# EAGLE board HGS_Reflector (EAGLE 9.6.1)
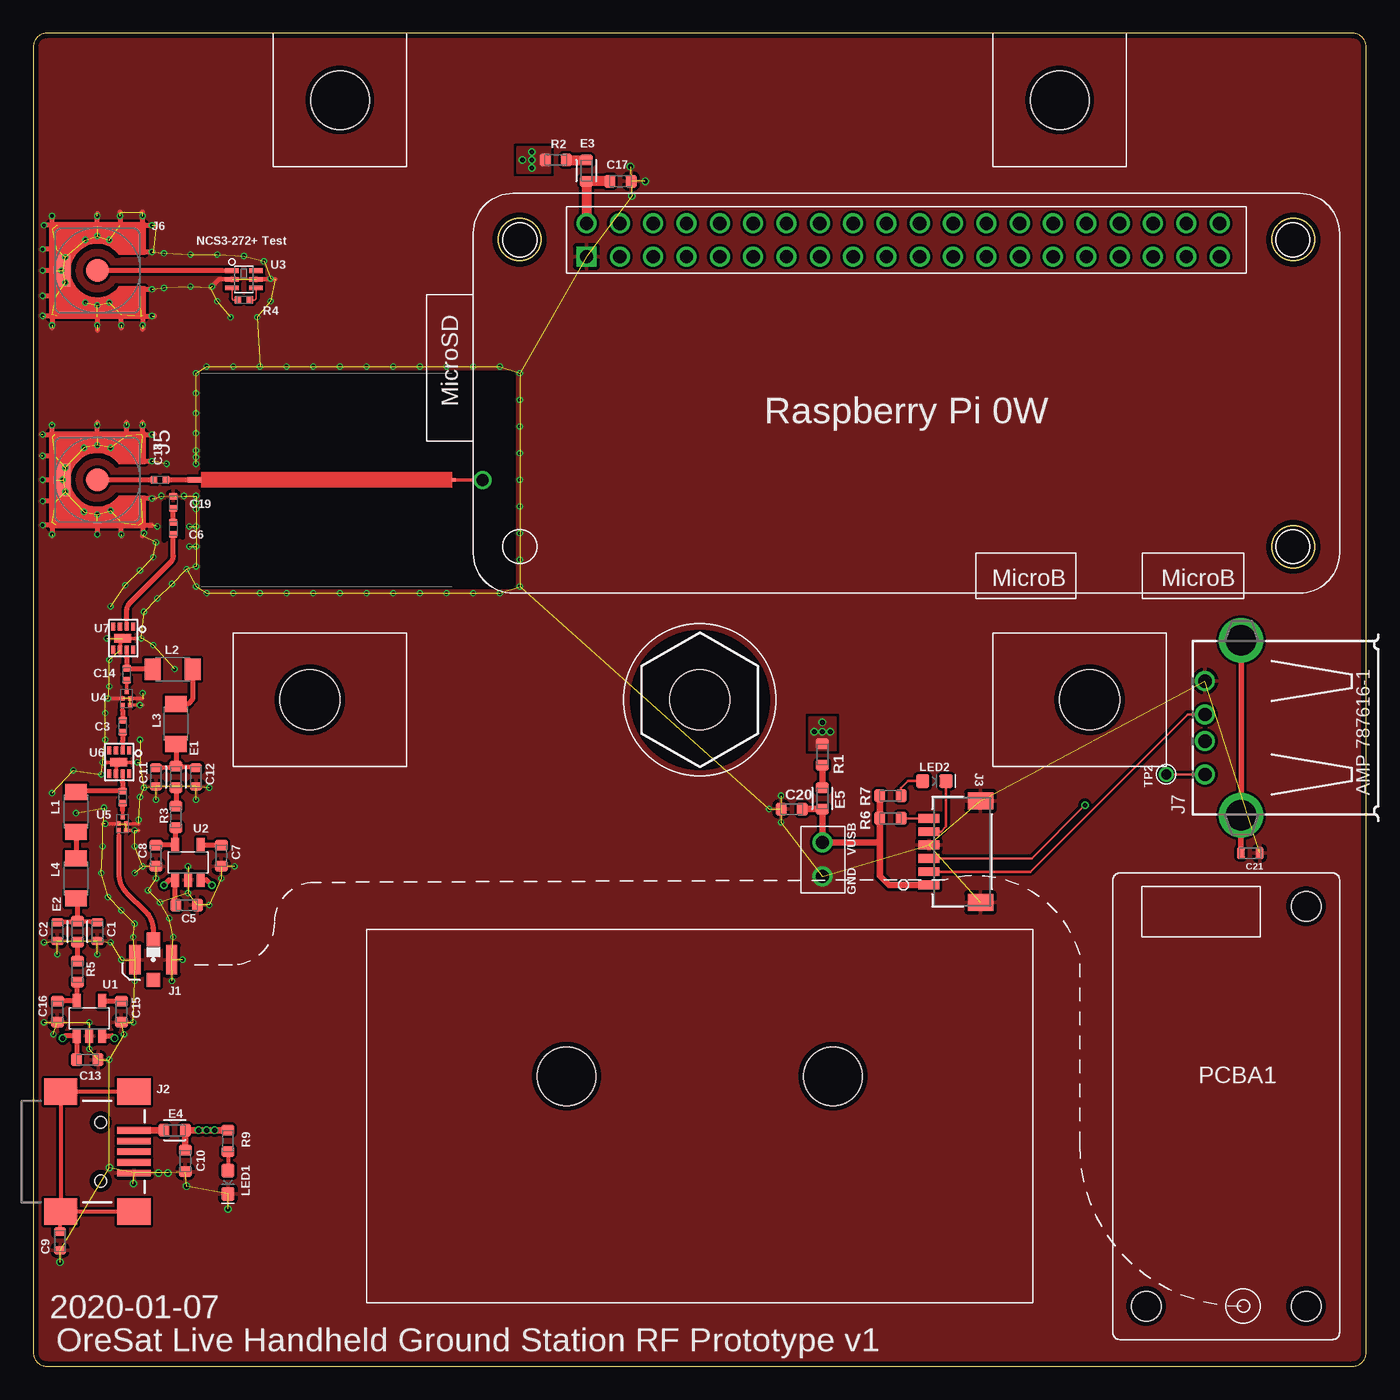
[diagram p0: board, top side]
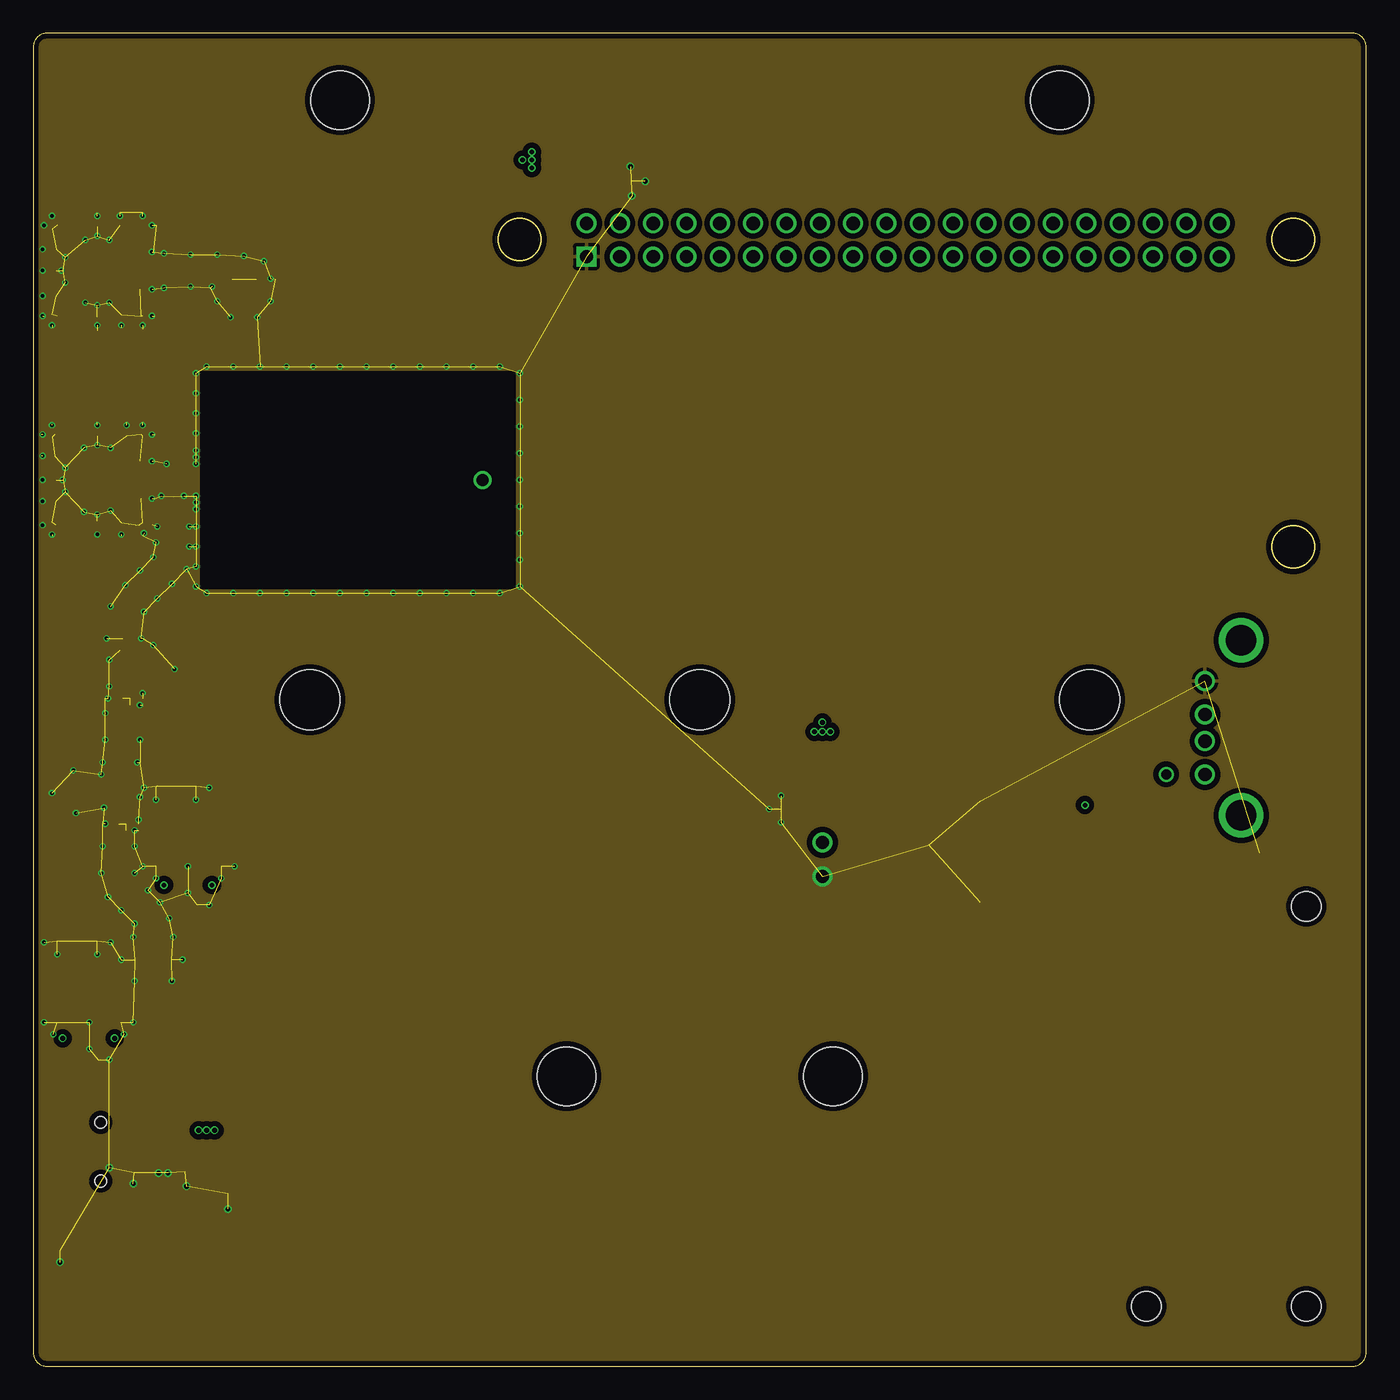
[diagram p1: board, inner layer Route2]
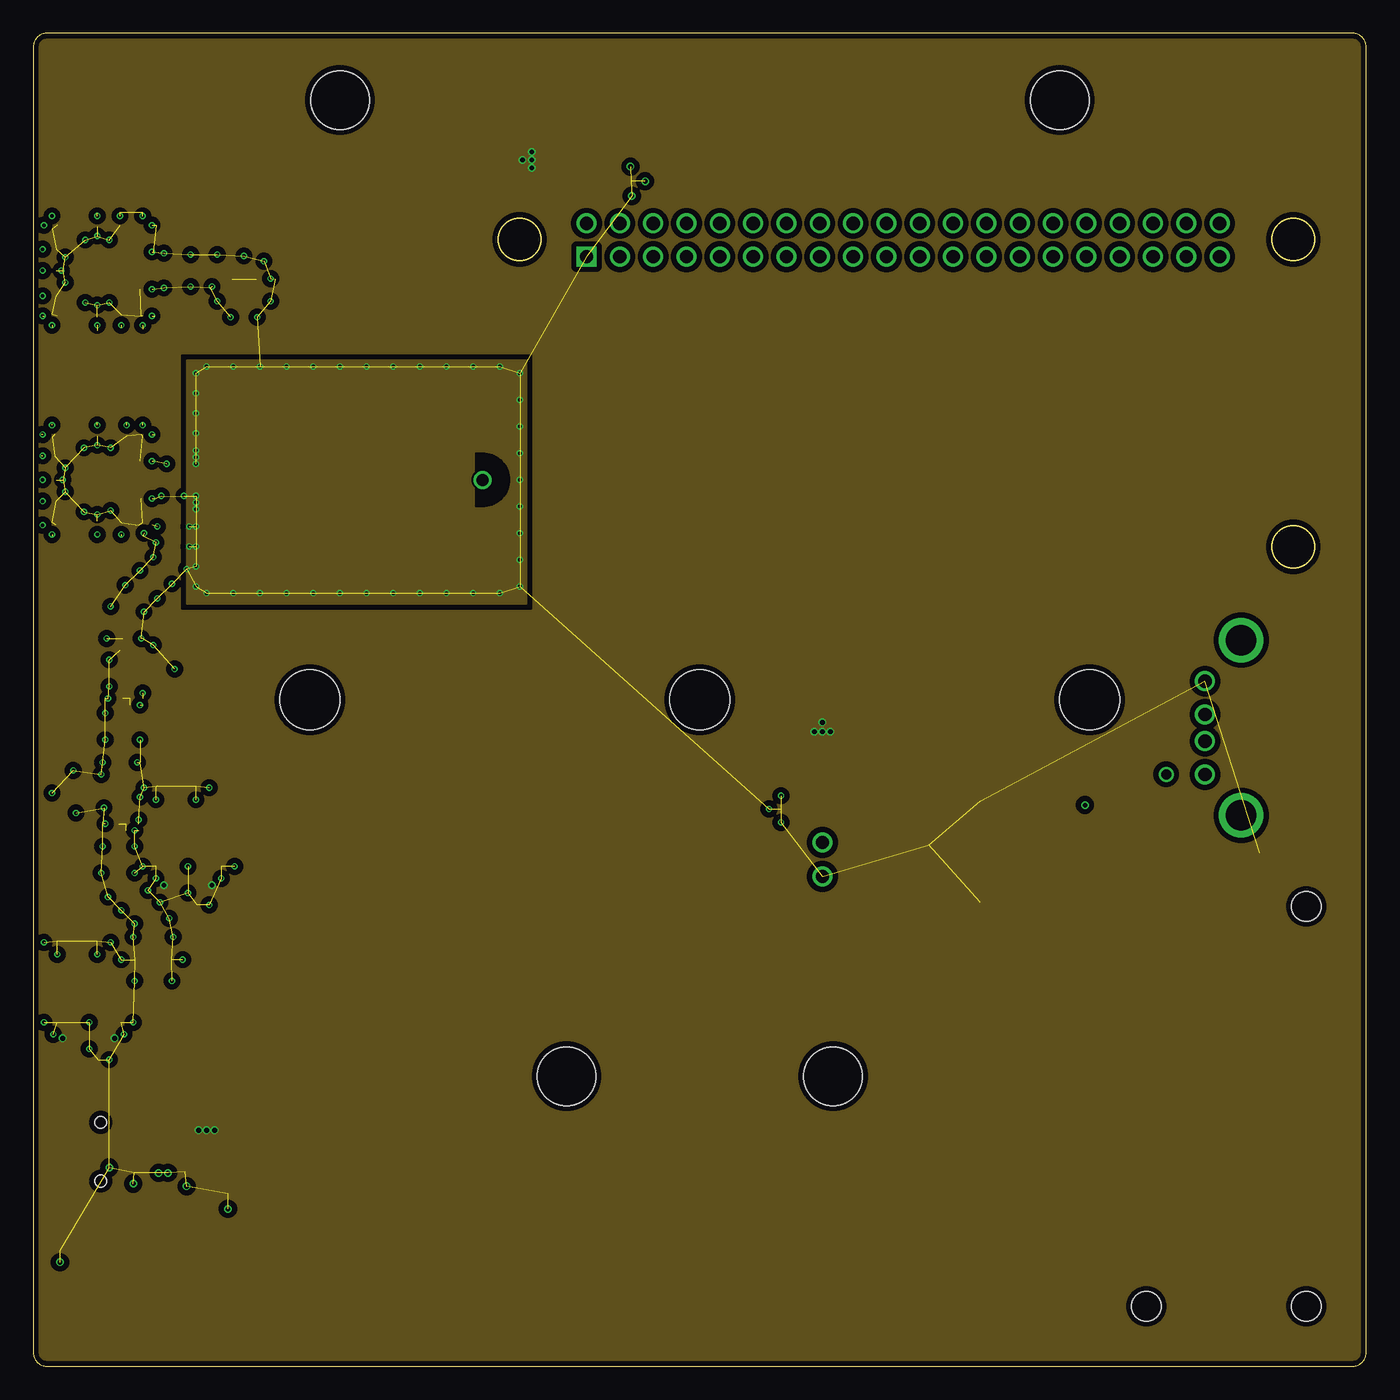
[diagram p2: board, inner layer Route15]
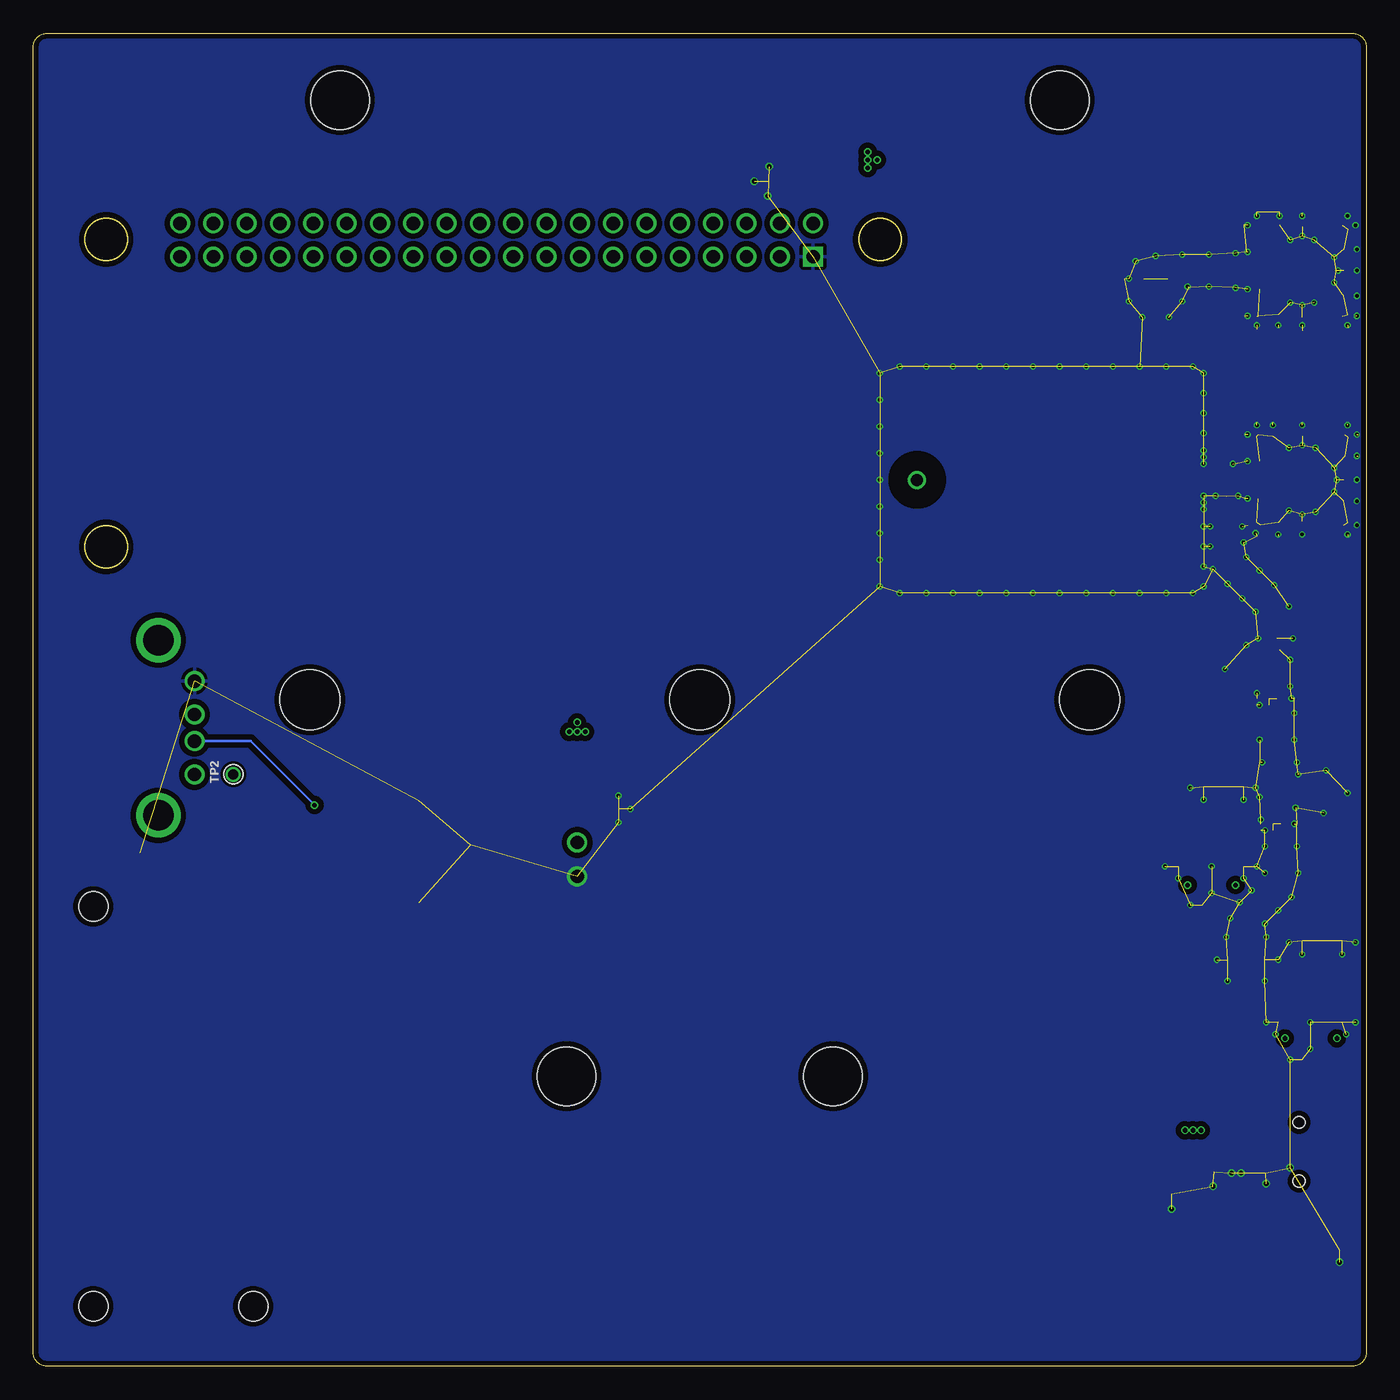
[diagram p3: board, bottom side, seen from below]

Size 100 x 100 mm. Coordinates in mm from the lower left corner, seen from the top.
Outline: 0,99 0,1 arc90 1,0 99,0 arc90 100,1 100,99 arc90 99,100 1,100 arc90 0,99
Outline: circle at 36.48,84.53 radius 1.59
Outline: circle at 94.53,84.53 radius 1.59
Outline: circle at 94.53,61.48 radius 1.59
Copper layers (1*2*15*16): Top 0.035559375mm / dielectric 0.17018125mm / Route2 0.01778125mm / dielectric 47mil / Route15 0.01778125mm / dielectric 0.17018125mm / Bottom 0.035559375mm
Design rules "oshpark-4layer-tented": minimum track width 5mil, minimum drill 10mil, track to track 5mil, track to pad 5mil, pad to pad 5mil, via to via 5mil, smd to smd 5mil, copper to edge 15mil, drill to drill 6mil, minimum pad ring 4mil, minimum via ring 4mil, stop-mask expansion 2.5mil, vias tented up to drill 20mil, thermal gap 10mil
Net classes: 2 RF: clearance 0.75 mm
Holes 4.5 mm at 20.75,50 79.25,50 50,50
Holes 4.4 mm at 77,95 23,95 60,21.76 40,21.76
tKeepout: area 24.5,4.2 to 75.5,33.2; area 71.5,44.5 to 85.5,55.5; area 14.5,44.5 to 28.5,55.5; area 17.5,89.5 to 28.5,100; area 71.5,89.5 to 82.5,100; area 44,44 to 56,56
bKeepout: area 17.5,89.5 to 28.5,100.5; area 71.5,89.5 to 82.5,100.5; area 11.8,14.7 to 88.2,72.7
tRestrict: area 45,45 to 55,55; 7 lines
bRestrict: area 32,64.8 to 35.4,68.2

## Footprints (pad centres in the part's own frame; a part is rotated, then mirrored left to right if it is on the bottom)
.0603-C-NOSILK = smd 0.6 x 0.9: 1 -0.7,0; 2 0.7,0
.0402-C-NOSILK = smd 0.5 x 0.6: 1 -0.45,0; 2 0.45,0
.0603-B-NOSILK = smd 0.8 x 0.95: 1 -0.8,0; 2 0.8,0
.0603-B = smd 0.8 x 0.95: 1 -0.8,0; 2 0.8,0
U.FL = smd 2.2 x 0.85: 1 0,1.375; 2 0,-1.375 | smd 1.05 x 1: FEED 1.525,0; NC -1.525,0
USB-MINIB = smd 2.5 x 0.5: D+ 2.5,0; D- 2.5,0.8; GND 2.5,-1.6; ID 2.5,-0.8; VBUS 2.5,1.6 | smd 2.5 x 2: S1 -3,4.5; S2 2.5,4.5; S3 -3,-4.5; S4 2.5,-4.5 | hole 0.9: 0,2.2; 0,-2.2
CONN_SM06B-SRSS-TB_JST = smd 0.66 x 1.549: 1 -2.5,2.507; 2 -1.5,2.507; 3 -0.5,2.507; 4 0.5,2.507; 5 1.5,2.507; 6 2.5,2.507 | smd 1.295 x 1.905: 7 -3.8,-1.368; 8 3.8,-1.368
132134-10 = smd 1.73 x 1.73: CENTER 0,0 | smd 2.41 x 1: SHIELD 0,-2.54
GHI2_USB_HOST_HORIZONTAL_W/CHASSIS_GND = drill 1: 1 -3.5,12.99; 2 -1,12.99; 3 1,12.99; 4 3.5,12.99 | drill 2.3: 5 -6.57,10.28; 6 6.57,10.28
L3216C = smd 1.2 x 1.6: 1 -1.5,0; 2 1.5,0
LED-0603 = smd 1 x 1: A -0.877,0; C 0.877,0
WF-NP9202 = hole 2.2: -6,-15; 6,-15; 6,15
RASP_PI_0W = drill 1: 5V -24,12.75; P$2 -21.5,12.75; P$3 -19,12.75; P$4 -16.5,12.75; P$5 -14,12.75; P$6 -11.5,12.75; P$7 -9,12.75; P$8 -6.5,12.75; P$9 -4,12.75; P$10 -1.5,12.75; P$11 1,12.75; P$12 3.5,12.75; P$13 6,12.75; P$14 8.5,12.75; P$15 11,12.75; P$16 13.5,12.75; P$17 16,12.75; P$18 18.5,12.75; P$19 21,12.75; P$20 23.5,12.75; P$22 -21.5,10.25; P$23 -19,10.25; P$24 -16.5,10.25; P$25 -14,10.25; P$26 -11.5,10.25; P$27 -9,10.25; P$28 -6.5,10.25; P$29 -4,10.25; P$30 -1.5,10.25; P$31 1,10.25; P$32 3.5,10.25; P$33 6,10.25; P$34 8.5,10.25; P$35 11,10.25; P$36 13.5,10.25; P$37 16,10.25; P$38 18.5,10.25; P$39 21,10.25; P$40 23.5,10.25 | drill 1 square: GND -24,10.25
QWT_2.422G-V2 = smd 1 x 0.38: 50-OUT -9.917,0 | smd 0.273 x 0.273: 140-IN 9.554,0
1X01 = drill 0.737 pad 1.1: 1 0,0
SOT-23 = smd 1.1 x 0.6: 1 -1.3,0.95; 2 -1.3,0; 3 -1.3,-0.95; 4 1.3,-0.95; 5 1.3,0.95
GE0805C-1 = smd 0.35 x 1: 1 -0.65,-0.9; 2 0,-0.9; 3 0.65,-0.9; 4 0.65,0.9; 5 0,0.9; 6 -0.65,0.9
QPQ1907 = smd 0.254 x 0.33: GND -0.495,-0.285; GND2 0,0.285; GND3 0,-0.285; INPUT 0.495,0; OUTPUT -0.495,0.285
TP3M9037 = smd 0.305 x 0.61: 2X2_DFN_8PIN1 -0.8,-0.885; 2X2_DFN_8PIN2 -0.3,-0.885; 2X2_DFN_8PIN3 0.2,-0.885; 2X2_DFN_8PIN4 0.7,-0.885; 2X2_DFN_8PIN5 0.7,0.85; 2X2_DFN_8PIN6 0.2,0.85; 2X2_DFN_8PIN7 -0.3,0.85; 2X2_DFN_8PIN8 -0.8,0.85 | smd 1.27 x 0.635: P$1 0,0

## Placement (x,y rotation side)
C1  100 pF  [.0603-C-NOSILK]  4.8,32.6 270 top
C2  1 uF  [.0603-C-NOSILK]  1.8,32.6 270 top
C3  100 pF  [.0402-C-NOSILK]  6.7,48 270 top
C4  100 pF  [.0402-C-NOSILK]  6.7,42.7 270 top
C5  1 uF  [.0603-B-NOSILK]  11.5,34.6 180 top
C6  100 pF  [.0402-C-NOSILK]  10.5,62.85 270 top
C7  10 nF  [.0603-B-NOSILK]  14.1,38.3 270 top
C8  2.2 uF  [.0603-B-NOSILK]  9.2,38.3 270 top
C9  100 pF  [.0603-C-NOSILK]  2,9.4 90 top
C10  1 uF  [.0603-B-NOSILK]  11.4,15.4 90 top
C11  100 pF  [.0603-C-NOSILK]  9.2,44.2 270 top
C12  1 uF  [.0603-C-NOSILK]  12.2,44.2 270 top
C13  1 uF  [.0603-B-NOSILK]  4.05,23 180 top
C14  100 pF  [.0402-C-NOSILK]  7,51.9 270 top
C15  10 nF  [.0603-B-NOSILK]  6.6,26.6 270 top
C16  2.2 uF  [.0603-B-NOSILK]  1.8,26.6 270 top
C17  1 uF  [.0603-B-NOSILK]  44.05,88.9 180 top
C18  100 pF  [.0402-C-NOSILK]  9.5,66.5 180 top
C19  100 pF  [.0402-C-NOSILK]  10.5,64.8 270 top
C20  1 uF  [.0603-B-NOSILK]  56.9,41.8 0 top
C21  100 pF  [.0603-C-NOSILK]  91.3,38.5 180 top
E1  BLM18GG471SZ1D  [.0603-B]  10.7,44.2 90 top
E2  BLM18GG471SZ1D  [.0603-B]  3.3,32.6 90 top
E3  BLM18DN381SZ1D  [.0603-B]  41.5,89.7 270 top
E4  BLM18DN381SZ1D  [.0603-B]  10.6,17.7 0 top
E5  BLM18GG471SZ1D  [.0603-B]  59.2,42.6 270 top
J1  U.FL  [U.FL]  9,30.5 90 top
J2  USB_MINI-B_SMT  [USB-MINIB]  5.05,16.1 0 top
J3  SM06B-SRSS-TB(LF)(SN)  [CONN_SM06B-SRSS-TB_JST]  69.7,38.6 90 top
J5  132134-10  [132134-10]  4.8,66.5 270 top
J6  132134-10  [132134-10]  4.8,82.2 270 top
J7  [GHI2_USB_HOST_HORIZONTAL_W/CHASSIS_GND]  100.9,47.9 90 top
L1  10n  [L3216C]  3.2,41.6 270 top
L2  10n  [L3216C]  10.45,52.29 0 top
L3  8n  [L3216C]  10.7,48.2 270 top
L4  8n  [L3216C]  3.2,36.6 270 top
LED1  GREEN  [LED-0603]  14.6,13.8 270 top
LED2  GREEN  [LED-0603]  67.6,43.9 0 top
PCBA1  WF-NP9202WF  [WF-NP9202]  89.5,19.5 0 top
PCBA2  [RASP_PI_0W]  65.5,73 0 top
R1  0  [.0603-B-NOSILK]  59.2,45.9 270 top
R2  0  [.0603-B-NOSILK]  39.2,90.5 0 top
R3  0  [.0603-B-NOSILK]  10.7,41.2 90 top
R4  150  [.0402-C-NOSILK]  15.8,80 180 top
R5  0  [.0603-B-NOSILK]  3.3,29.6 90 top
R6  0  [.0603-B-NOSILK]  64.3,41.1 0 top
R7  1k  [.0603-B-NOSILK]  64.3,42.8 180 top
R9  1k  [.0603-B-NOSILK]  14.6,16.9 90 top
T1  QWT2.4222  [QWT_2.422G-V2]  22,66.5 0 top
TP2  TEST-POINT-LARGE-SQUARE  [1X01]  85,44.4 90 top
U1  LP2985XX-N  [SOT-23]  4.2,26.1 90 top
U2  LP2985XX-N  [SOT-23]  11.6,37.8 90 top
U3  NCS3-272+  [GE0805C-1]  15.8,81.55 270 top
U4  QPQ1907  [QPQ1907]  7,50.1 90 top
U5  QPQ1907  [QPQ1907]  6.7,40.7 90 top
U6  LNA-TP3M9037  [TP3M9037]  6.4,45.3 180 top
U7  LNA-TP3M9037  [TP3M9037]  6.7,54.6 180 top

## Library data of the parts
C1-C21 E1-E5 R1-R7 R9 = oresat-rcl
J1 = SparkFun-Connectors; PROD_ID: CONN-09193; SF_ID: WRL-09144
J2 = SparkFun-Connectors; PROD_ID: CONN-08193; SF_ID: PRT-00587
J3 = J-JST-SM06B-SRSS-TB(LF)(SN)-1mm-smt-6pin; BUILT_BY: EMA_Justin; COPYRIGHT: Copyright (C) 2018 Accelerated Designs. All rights reserved; DATASHEET: http://www.jst-mfg.com/product/pdf/eng/eSR.pdf; MANUFACTURER_PART_NUMBER: SM06B-SRSS-TB(LF)(SN); SOURCELIBRARY: JST_2020-02-24; VENDOR: JST
J5 J6 = J-Amphenol-132134-10-SMA-F-SMT-vertical
J7 = BeagleBone_Blue_R3
L1 = rcl; IMPEDANCE: 10 nH
L2 = rcl; SPICEPREFIX: 10 nH
L3 L4 = rcl; IMPEDANCE: 8 nH
LED1 LED2 = SparkFun-LED; PROD_ID: DIO-00821
PCBA1 = PCBA-WF-NP9202-wifi-adapter
PCBA2 = Rasp_Pi_0W
T1 = TM-QWT-2.422GHz
TP2 = oresat-misc
U1 U2 = U-TI-LP2985XX-N-linear-reg
U3 = U-MiniCirc-NCS3-272+-1-to-3-transformer
U4 U5 = U-Qorvo-QPQ1907-2.4GHz-BAW-BPF
U6 U7 = TP3M9037_LNA

## Nets
GND: C1.2 C2.2 C5.1 C7.2 C8.2 C9.1 C10.1 C11.2 C12.2 C13.1 C15.2 C16.2 C17.1 C19.1 C20.1 C21.1 J1.1 J1.2 J2.GND J3.4 J3.7 J3.8 J5.SHIELD J6.SHIELD J7.4 LED1.C PCBA2.GND U1.2 U2.2 U3.2 U3.5 U4.GND U4.GND2 U4.GND3 U5.GND U5.GND2 U5.GND3 U6.2X2_DFN_8PIN6 U6.P$1 U7.2X2_DFN_8PIN6 U7.P$1
HELICAL: T1.140-IN
N$1: C7.1 U2.4
N$2: E1.1 R3.2
N$3 [RF]: C4.2 U5.INPUT
N$4 [RF]: C3.1 U4.OUTPUT
N$5 [RF]: J1.FEED U5.OUTPUT
N$6 [RF]: C14.2 U4.INPUT
N$7: L2.2 L3.1
N$8 [RF]: C3.2 U6.2X2_DFN_8PIN2
N$9: E2.1 R5.2
N$10: LED1.A R9.1
N$11 [RF]: C6.2 U7.2X2_DFN_8PIN2
N$12: C9.2 J2.S1 J2.S2 J2.S3 J2.S4
N$13 [RF]: C4.1 L1.1 U6.2X2_DFN_8PIN7
N$14: L1.2 L4.1
N$15: C17.2 E3.2 PCBA2.5V
N$16 [RF]: C14.1 L2.1 U7.2X2_DFN_8PIN7
N$17: E4.1 J2.VBUS
N$18: E3.1 R2.2
N$19: C15.1 U1.4
N$20 [power]: C11.1 C12.1 E1.2 L3.2
N$21 [power]: C1.1 C2.1 E2.2 L4.2
N$22 [power]: C16.1 R5.1 U1.5
N$23 [RF]: C18.2 J5.CENTER
N$24 [RF]: J6.CENTER U3.1
N$25 [power]: C8.1 R3.1 U2.5
N$26 [RF]: R4.2 U3.3
N$27 [RF]: R4.1 U3.4
N$28: C6.1 C19.2
N$29: C20.2 E5.2 J3.1 R6.1 R7.2
N$30: E5.1 R1.2
N$31: J3.6 R6.2
N$32: LED2.A R7.1
N$33: J3.2 J7.3
N$34: J3.5 LED2.C
N$36: J3.3 J7.2
N$37: J7.1 TP2.1
N$38: C21.2 J7.5 J7.6
T1-50 [RF]: C18.1 T1.50-OUT
VUSB: C5.2 C10.2 C13.2 E4.2 R1.1 R2.1 R9.2 U1.1 U1.3 U2.1 U2.3

## Tracks (layer width: path | path; a pad name or v marks a point on that pad's centre or on a via)
ALKSJDLAKS
  cutout Route15: 33.7,68.5 arc-90 35.7,66.5 arc-90 33.7,64.5 33.2,64.5 33.2,68.5
GND  (via drill 0.25, 0.35, 1)  (262 unrouted)
  Top 0.25: U5.GND 7.89,40.2 | U5.GND3 7.9,40.7 | U5.GND2 5.2,40.7 | 8,45.3 U6.P$1 6.2,45.3 | 6.2,45.3 v5.2,45.3 | U6.2X2_DFN_8PIN6 6.2,45.3 | U4.GND3 8.2,50.1 | U4.GND 8.2,49.6 | U4.GND2 5.4,50.1 | 8.2,54.6 U7.P$1 6.5,54.4 U7.2X2_DFN_8PIN6
  Top 0.35: U3.5 18.15,81.55 | U3.2 13.95,81.55 13.3,80.9
  Top 0.38: 9,83.6 8,83.6 | 9.2,85.6 8.2,85.6 8.2,86.6 | 4.8,85.5 4.8,86.5 | 1.4,85.3 v1.4,86.3 | 1.8,85.6 v0.8,85.6 | 1.7,82.2 v0.7,82.2 | 1.7,83.8 v0.7,83.8 | 1.7,80.3 v0.7,80.3 | 1.8,78.8 0.8,78.8 | 1.4,78.9 1.4,77.9 | 4.8,78.7 4.8,77.7 | 8.2,78.8 8.2,77.8 | 8.1,78.8 9.1,78.8 | 6.6,77.9 6.6,78.9 | 8,80.8 9,80.8 | 6.5,86.6 6.5,85.6 | 8,67.9 9,67.9 | 8.1,69.9 9.1,69.9 | 8.2,69.8 8.2,70.8 | 4.8,69.8 4.8,70.8 | 7,69.8 7,70.8 | 0.6,69.9 1.6,69.9 | 1.4,69.7 1.4,70.7 | 1.7,66.5 v0.7,66.5 | 1.6,68.3 0.6,68.3 | 1.7,64.9 v0.7,64.9 | 1.7,63.1 v0.7,63.1 | 1.4,63.3 1.4,62.3 | 4.8,63.4 v4.8,62.4 | 8.2,63.3 8.2,62.3 | 7.9,63.1 8.9,63.1 | 6.6,62.3 6.6,63.3 | 9.1,65.1 8.1,65.1
  other vias: 33,75 31,75 29,75 27,75 25,75 23,75 21,75 19,75 17,75 15,75 13,75 10,67.7 13,58 15,58 17,58 19,58 21,58 23,58 25,58 27,58 29,58 31,58 33,58 35,58 36.5,58.5 36.5,60.5 36.5,62.5 36.5,64.5 36.5,66.5 36.5,68.5 36.5,70.5 36.5,72.5 36.5,74.5 35,75 12.2,67.7 12.2,65.3 12.2,68.2 12.2,64.8 12.2,64.3 12.2,68.7 9.6,65.3 11.3,65.3 12.2,58.5 12.2,60 12.2,61.5 12.2,63 12.2,74.5 12.2,73 12.2,71.5 12.2,70 11.5,13.5 14.6,11.8 9.4,14.5 10.1,14.5 7.5,13.7 5.7,14.9 2,7.8 45.9,88.9 17.8,81.6 13.4,81 9.8,80.9 9.8,83.5 11.8,83.4 11.8,81 13.8,83.4 15.8,83.3 17.8,79.9 16.8,78.7 14.8,78.7 13.8,79.9 17.3,82.9 44.9,87.8 44.8,90 8,42.7 14.1,36.6 4.2,23.8 4.2,25.8 5.7,23 0.8,25.8 7.5,25.8 13.2,34.6 11.6,35.5 11.6,37.5 8.2,37.5 15.1,37.5 9.2,36.6 6.8,24.9 1.5,24.9 4.8,30.9 1.8,30.9 0.8,31.8 5.8,31.8 6.6,30.5 11.2,30.5 10.4,28.9 7.6,28.9 7.5,32.2 10.5,32.2 8.3,43.4 9.2,42.5 12.2,42.5 13.2,43.4 59.2,36.75 56.1,42.8 56.1,40.8 55.2,41.8 9.3,63 11.7,63 8.3,56.6 5.8,57 8.1,54.6 5.5,54.6 5.7,53 9,54.1 10.6,52.3 8.2,50.5 5.7,51 5.6,50.1 8,49.6 5.4,49 5.4,47 8,47 7.8,45.3 5.1,44.4 3,44.7 1.4,43 3.2,41.5 5.3,41.9 7.9,41 5.4,40.7 7.6,40.2 7.6,39 5.2,39 5.1,37 7.6,37 8.6,35.7 5.6,35.2 6.6,34.2 7.6,33.2 9.5,34.8 10.2,33.6 8.9,80.8 8.9,78.8 4.8,78.1 4.8,84.8 4.8,79.6 4.8,86.3 2.1,82.2 8.9,83.6 8.9,85.6 8.2,86.3 0.7,78.8 1.4,78.1 6.6,78.1 8.2,78.1 6.5,86.3 6.9,58.6 8,59.7 9,60.7 9.2,61.8 9.3,57.6 10.4,58.7 11.5,59.8 4.8,69.1 4.8,63.9 2.2,66.5 8.9,65.1 8.3,62.5 11.7,61.5 6.6,62.4 1.4,62.4 0.7,68.3 0.7,69.9 1.4,70.6 4.8,70.6 7,70.6 8.2,70.6 8.9,69.9 8.9,67.9 3.8,64.1 5.8,64.2 2.4,65.6 2.4,67.4 3.8,68.9 5.8,68.9 5.7,79.8 3.9,79.8 2.4,81.3 2.4,83.2 3.9,84.5 5.7,84.5
  pour Route2 (isolate 0.4, rank 5): 100,0 100,100 0,100 0,0
  pour Top (isolate 0.2, rank 6): 100,0 100,100 0,100 0,0
  pour Bottom (isolate 0.4, rank 6): 100,0 100,100 0,100 0,0
  pour Route15: 11.5,75.5 37,75.5 37,57.2 11.5,57.2
HELICAL  (via drill 0.9 pad 0.9)
  Top 0.273: v33.7,66.5 T1.140-IN
KEEPOUT
  cutout Route2: 12.6,74.6 36.1,74.6 36.1,58.4 12.6,58.4
N$1
  Top 0.38: U2.4 C7.1
N$2
  Top 0.38: E1.1 R3.2
N$3
  Top 0.25: U5.INPUT 6.7,41.7
  Top 0.38: 6.7,41.7 C4.2
N$4
  Top 0.25: U4.OUTPUT 6.71,49.22 6.7,49.2
  Top 0.38: 6.7,49.2 C3.1
N$5
  Top 0.25: 6.42,39.8 6.4,39.8 6.4,40.19 U5.OUTPUT
  Top 0.38: J1.FEED 9,32.7 arc45 8.41,34.11 7,35.52 arc-45 6.42,36.94 6.42,39.8
N$6
  Top 0.25: C14.2 U4.INPUT
N$7
  Top 0.38: L2.2 11.95,50.05 11.6,49.7 L3.1
N$8
  Top 0.3: 6.7,46.9 U6.2X2_DFN_8PIN2
  Top 0.38: C3.2 6.7,46.9
N$9
  Top 0.38: E2.1 R5.2
N$10
  Top 0.3: R9.1 LED1.A
N$11
  Top 0.3: U7.2X2_DFN_8PIN2 7,56.1
  Top 0.38: C6.2 10.5,60.8 arc-45 10.31,60.34 7.29,57.32 arc45 7,56.62 7,56.1
N$12
  Top 0.3: J2.S2 J2.S1 | J2.S1 1.4,20.6 1.4,20.8 2.05,20.8 J2.S1 | J2.S4 J2.S3 | J2.S3 1.8,11.6 1.8,11.5 2.05,11.5 J2.S3 | J2.S1 J2.S3 | C9.2 2,11.6 J2.S3
N$13
  Top 0.3: U6.2X2_DFN_8PIN7 6.7,43.8
  Top 0.38: 6.7,43.8 C4.1 3.25,43.15 L1.1
N$14
  Top 0.38: L1.2 L4.1
N$15
  Top 0.75: PCBA2.5V E3.2 C17.2
N$16
  Top 0.3: U7.2X2_DFN_8PIN7 7,53.2
  Top 0.38: 7,53.2 C14.1 8.89,52.35 L2.1
N$17
  Top 0.5: J2.VBUS E4.1
N$18
  Top 0.75: R2.2 E3.1
N$19
  Top 0.38: U1.4 C15.1
N$20
  Top 0.38: L3.2 E1.2 | C11.1 E1.2 | C12.1 E1.2
N$21
  Top 0.38: L4.2 3.3,35 E2.2 | C2.1 E2.2 | C1.1 E2.2
N$22
  Top 0.38: R5.1 3.3,27.45 U1.5 C16.1
N$23
  Top 0.38: C18.2 J5.CENTER
N$24
  Top 0.35: U3.1 14.2,82.2
  Top 0.38: 14.2,82.2 J6.CENTER
N$25
  Top 0.38: C8.1 U2.5 10.65,40.35 R3.1
N$26
  Top 0.127: U3.3 14.9,80.1 15,80 R4.2
N$27
  Top 0.127: U3.4 16.7,80.1 16.6,80 R4.1
N$28
  Top 0.38: C6.1 C19.2
N$29  (via drill 1)
  Top 0.2: R6.1 R7.2
  Top 0.5: C20.2 E5.2 v59.2,39.3 63.5,39.3 | R7.2 63.5,39.3 | 63.5,39.3 63.5,36.8 64.2,36.1 J3.1
N$30
  Top 0.5: R1.2 E5.1
N$31
  Top 0.2: R6.2 J3.6
N$32
  Top 0.2: R7.1 65.1,43.4 65.6,43.9 LED2.A
N$33
  Top 0.2: J7.3 86.6,48.9 74.8,37.1 J3.2
N$34
  Top 0.2: LED2.C 68.48,40.48 68.1,40.1 J3.5
N$36  (via drill 0.35)
  Top 0.2: v78.9,42.1 74.9,38.1 J3.3
  Bottom 0.2: J7.2 83.7,46.9 v78.9,42.1
N$37
  Top 0.2: TP2.1 J7.1
N$38
  Top 0.3: 90.6,41.31 J7.5
  Top 0.4: C21.2 90.6,41.31 | J7.5 J7.6
T1-50
  Top 0.38: T1.50-OUT C18.1
VUSB  (via drill 0.35)
  Top 0.38: v9.8,36.1 10.2,36.5 U2.1 10.65,34.6 C5.2 | U2.3 13,36.5 v13.4,36.1 | C13.2 U1.1 2.4,24.8 v2.2,24.6 | U1.3 5.9,24.8 v6.1,24.6
  Top 0.5: R9.2 v13.6,17.7 v13,17.7 v12.4,17.7 E4.2 C10.2
  other vias: 37.4,90.5 36.7,90.5 37.4,91.1 37.4,89.9 59.2,47.6 59.2,48.3 59.8,47.6 58.6,47.6
  pour Route15 (isolate 0.4, rank 2): 0,0 100,0 100,100 0,100
  pour Top (isolate 0.2, no thermals): 38.8,90.5 38.8,89.5 36.3,89.5 36.3,91.5 38.7,91.5 38.8,91.5
  pour Top (isolate 0.2, no thermals): 60.2,46.2 58.2,46.2 58.2,48.7 60.2,48.7

## Text on the board
tPlace: NCS3-272+ Test | VUSB | GND | 2020-01-07 | OreSat Live Handheld Ground Station RF Prototype v1
tFinish: LNA-TP3M9037